# Altium PCB Antenna.PcbDoc
Units mil, origin at the board's own origin, x right, y up, seen from the top; angles counter-clockwise.
Board outline 3937.01 x 3937.01 mil, 2 copper layers (Top Layer, Bottom Layer), stack 64.567 mil thick; 11 components, 11 nets, 52 pads, 8 vias.
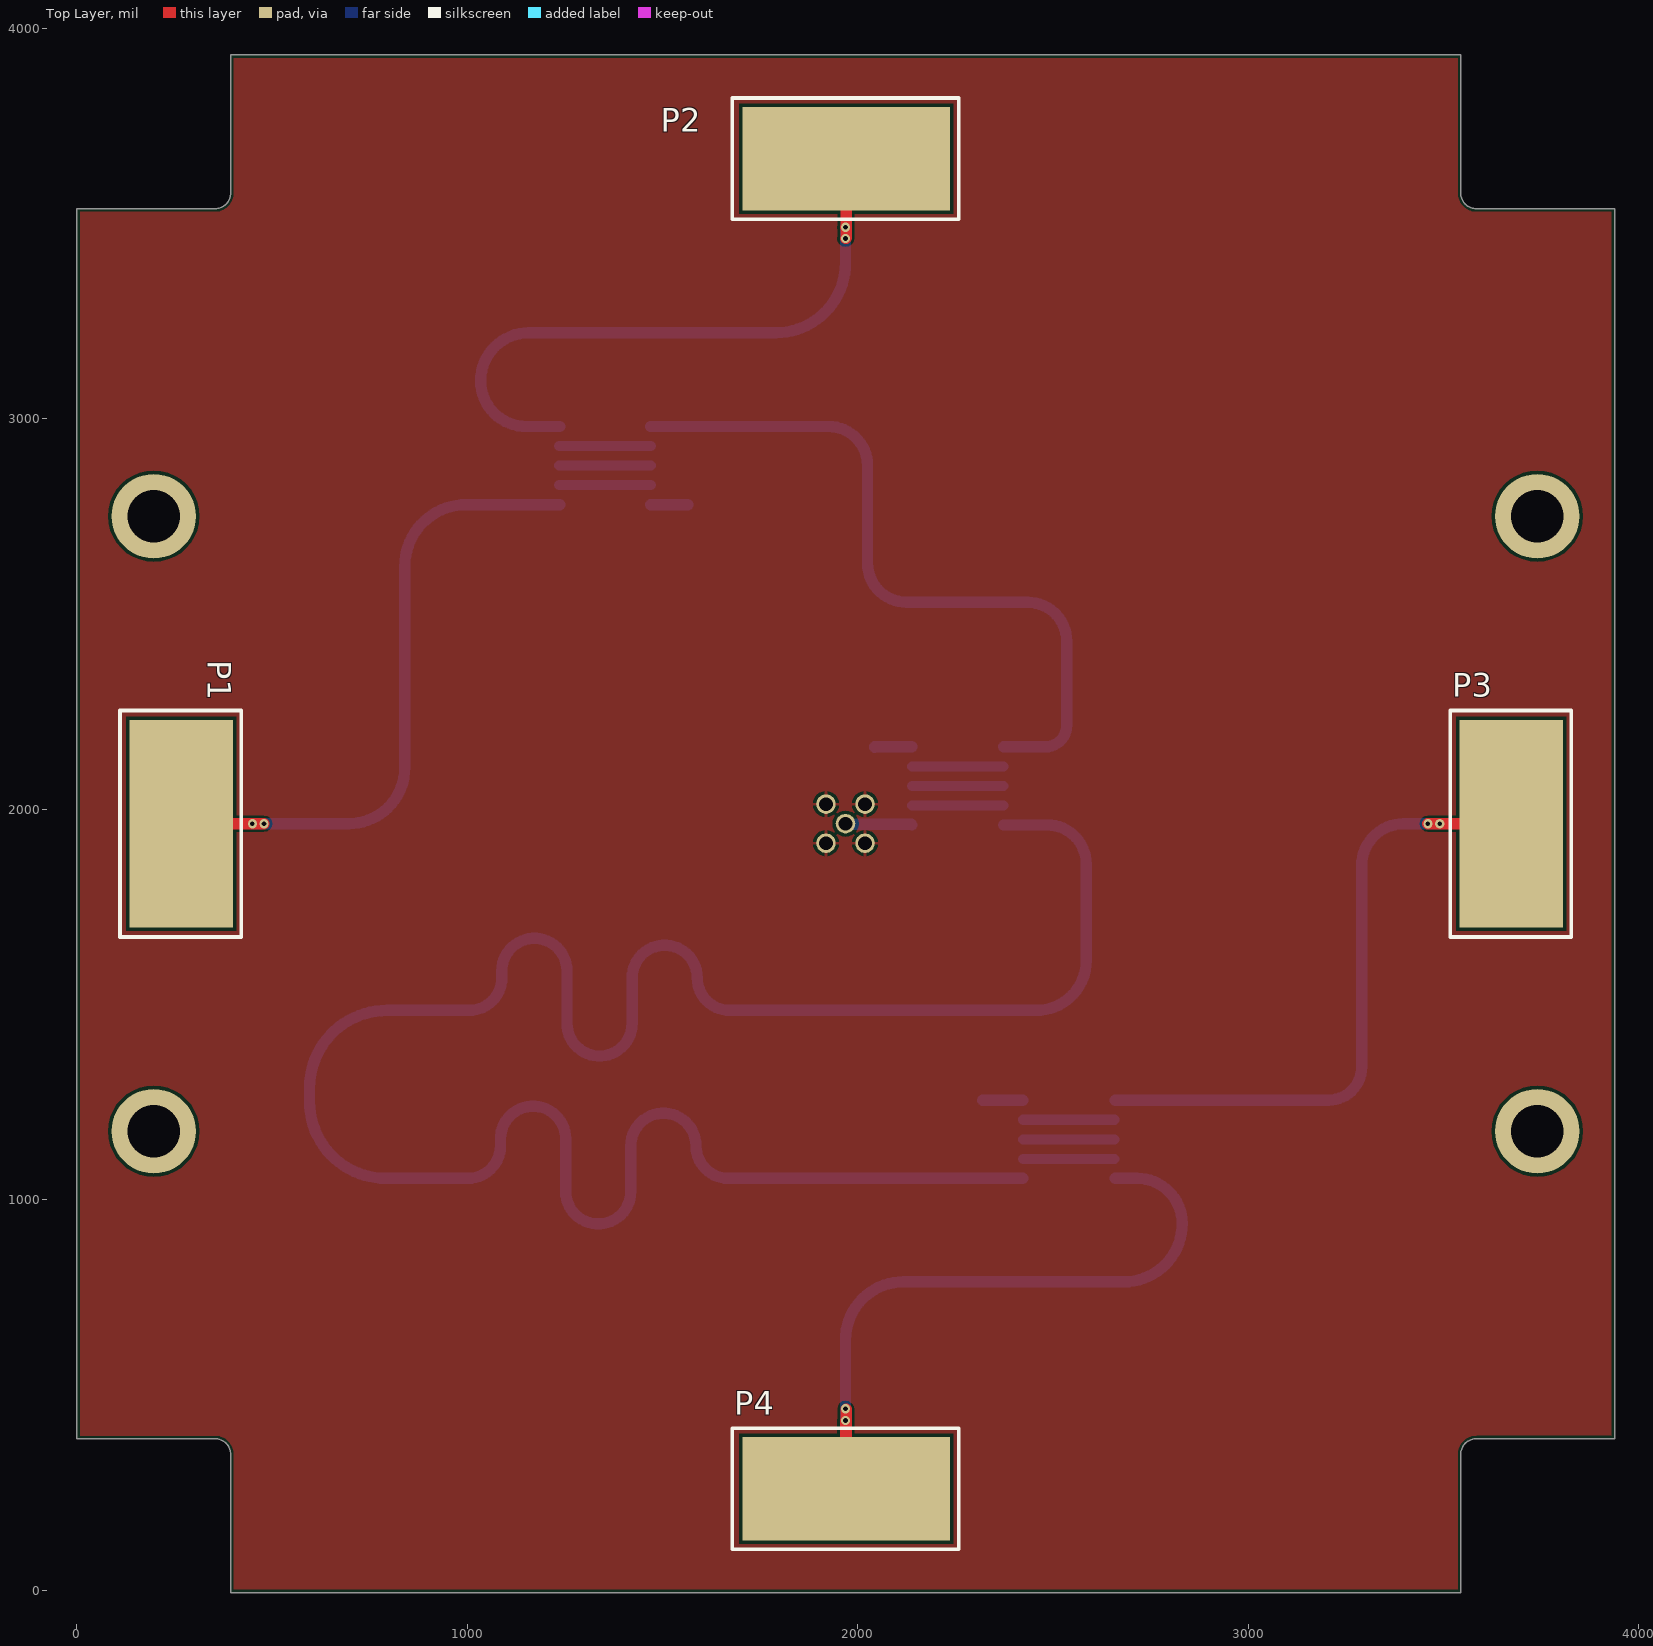
[diagram p0: Top Layer view]
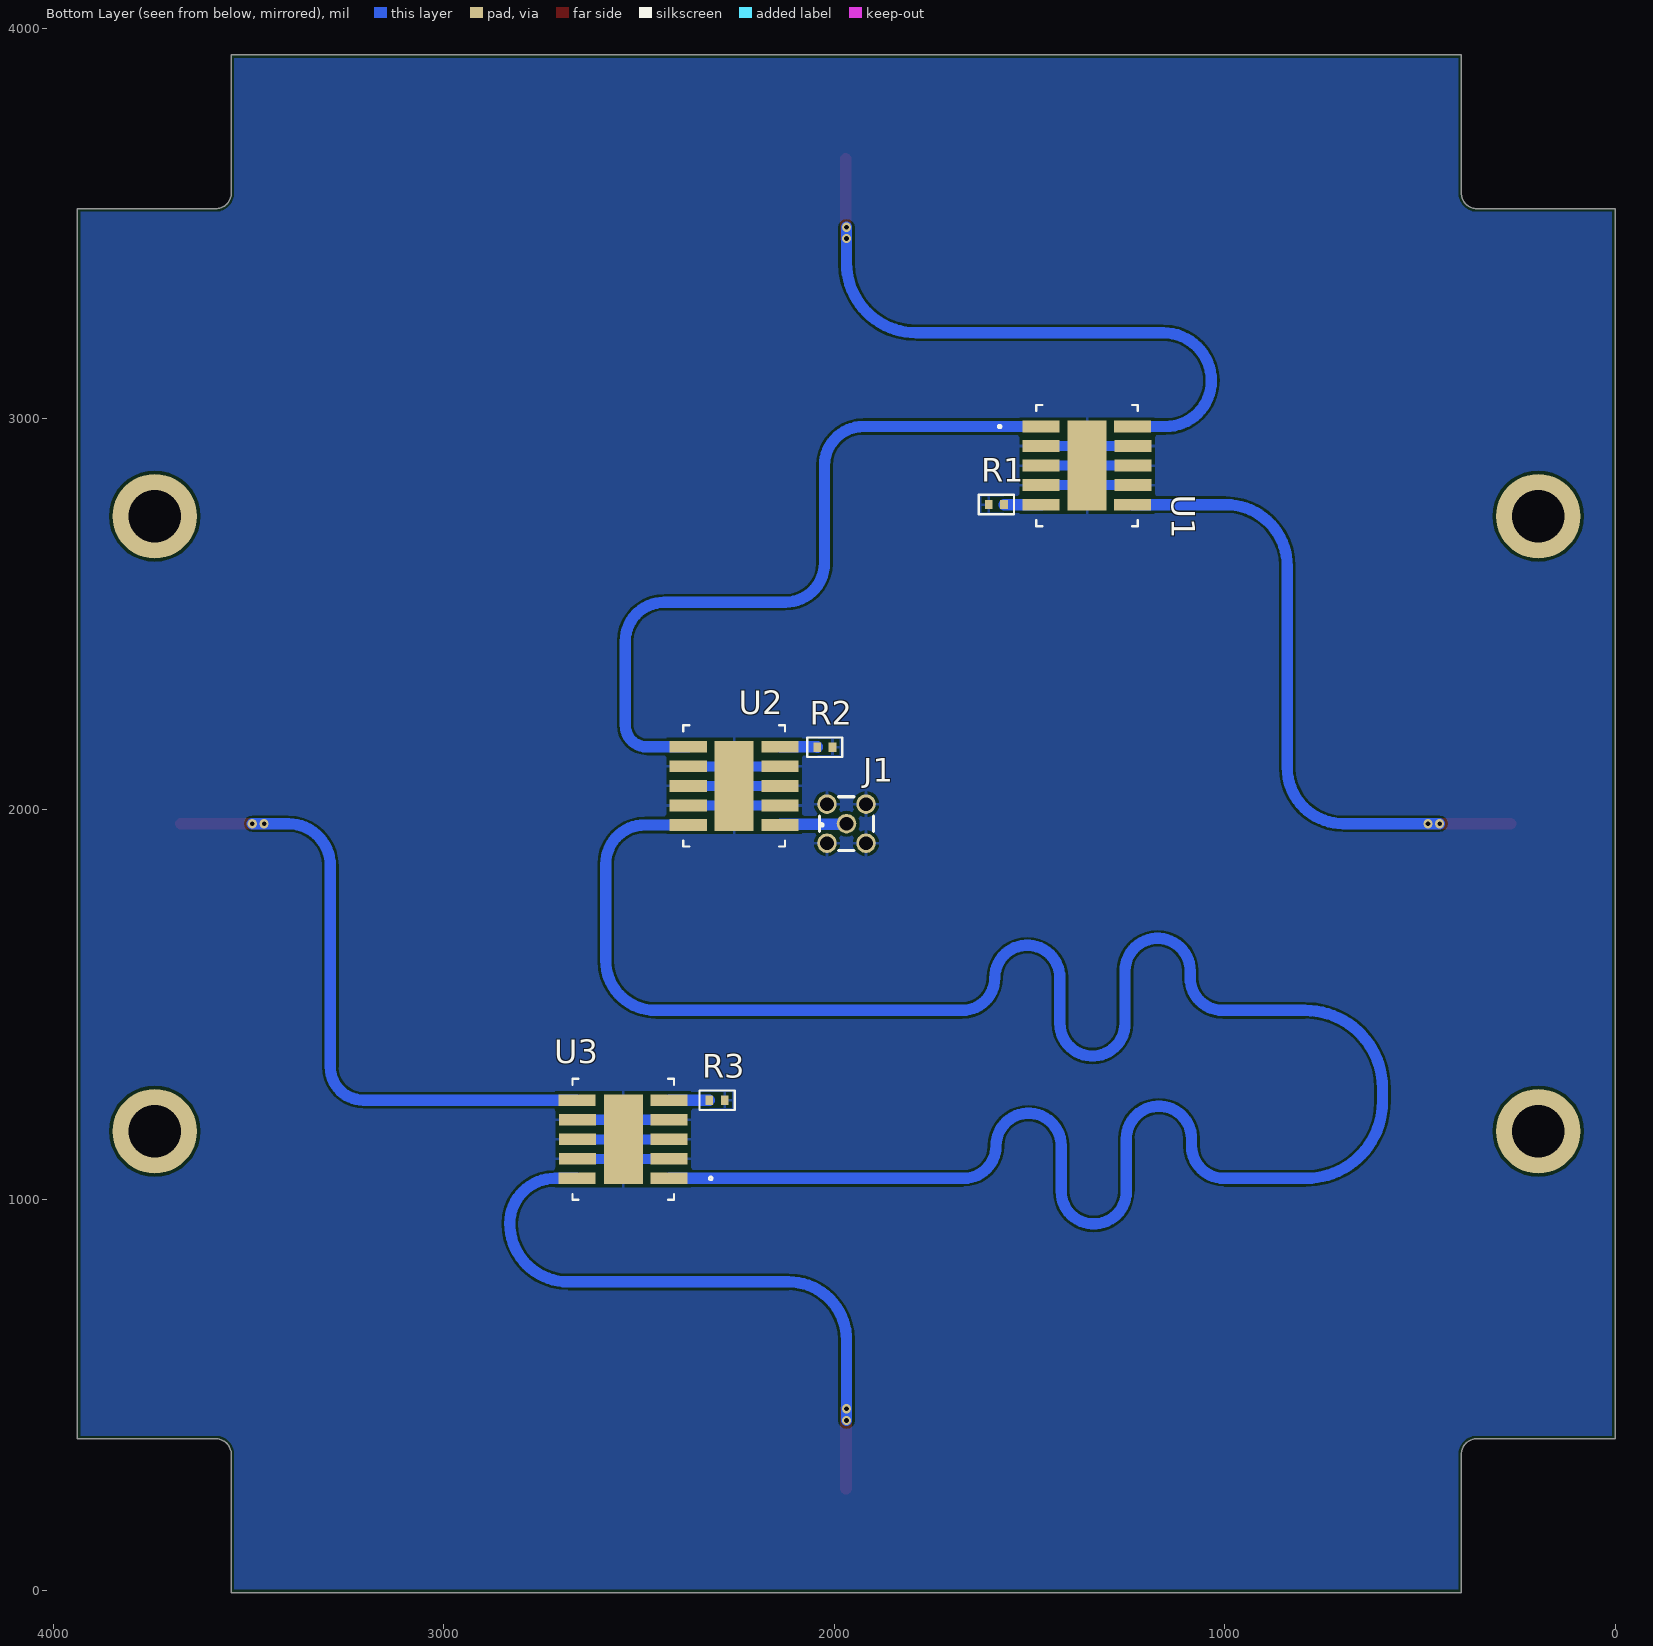
[diagram p1: Bottom Layer view, seen from below]
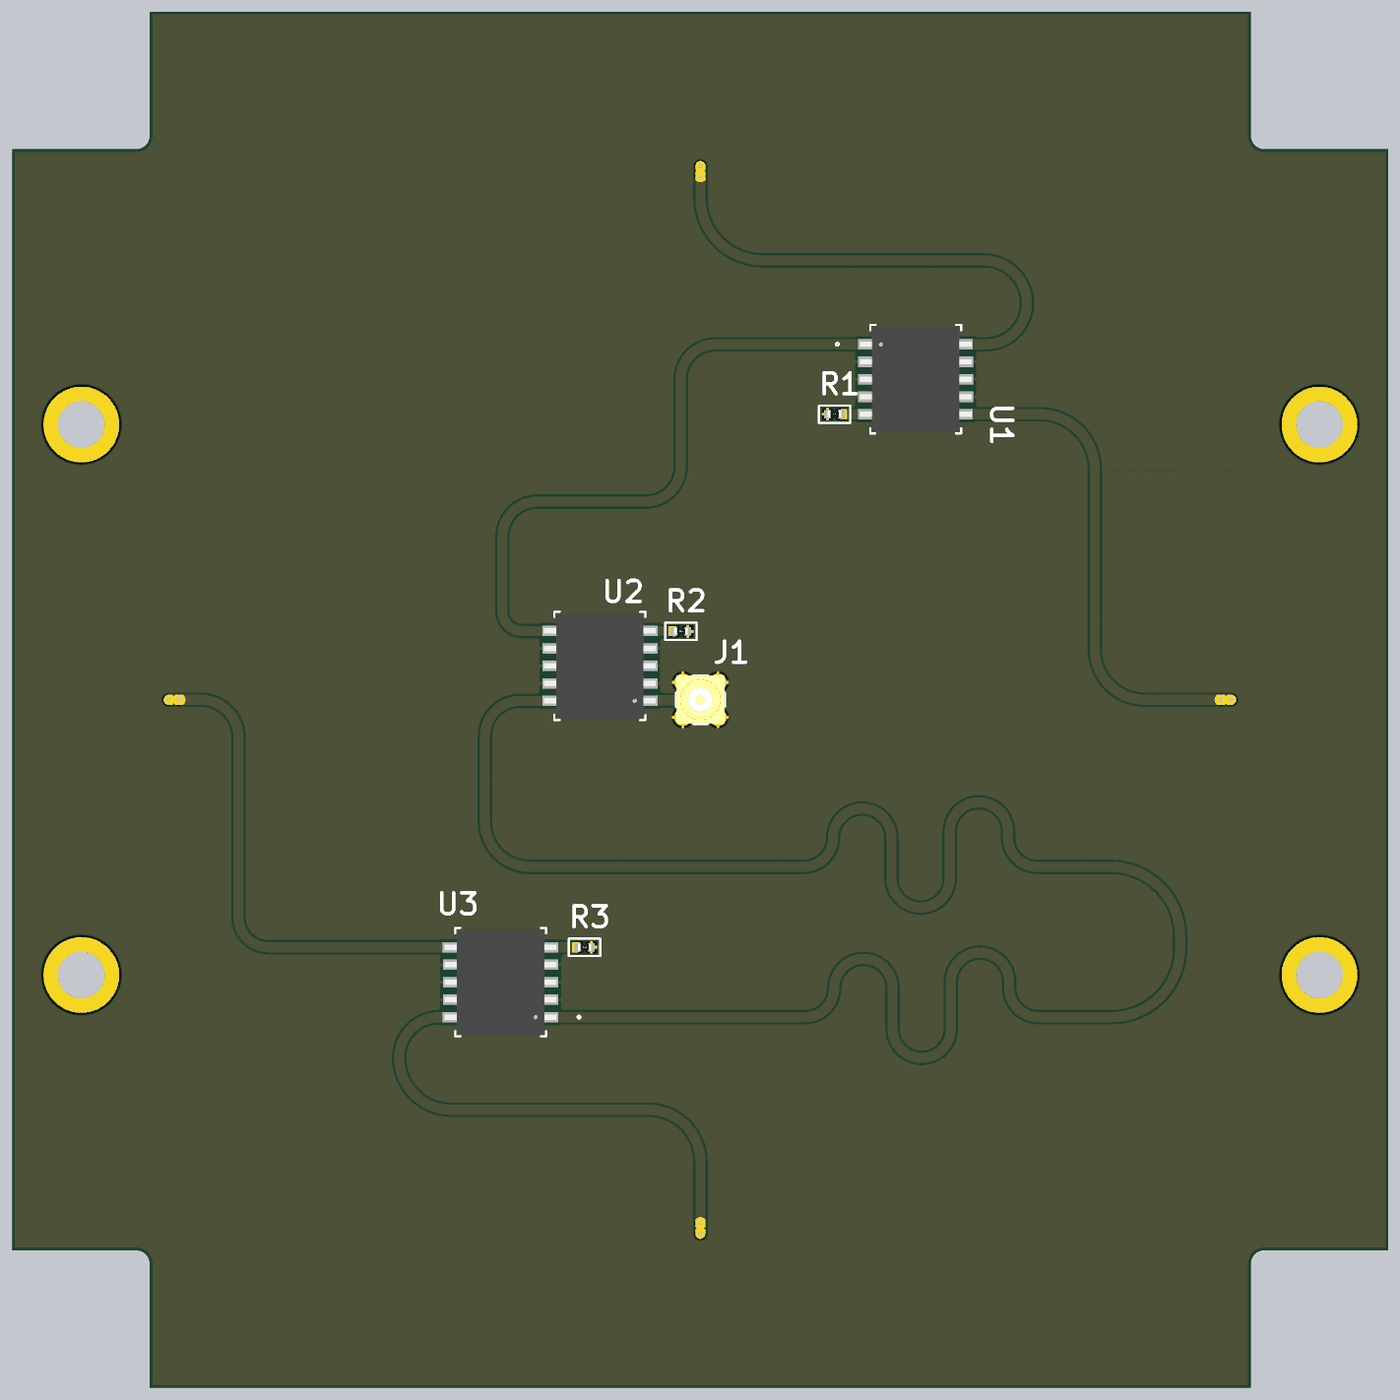
[diagram p2: 3D render of the assembled board from below, using the file's embedded part models]

## Layer stack, top to bottom
Top Solder: solder mask 0.4, Solder Resist, Dk 3.5
Top Layer: signal copper 1.378
Dielectric 1: core 61.811, FR-4, Dk 4.5
Bottom Layer: signal copper 1.378
Bottom Solder: solder mask 0.4, Solder Resist, Dk 3.5

## Board outline
0.5,388.2 354.83,388.2 cw(c354.83,348.83) 394.2,348.83 394.2,-5.5 3543.81,-5.5 3543.81,348.83 cw(c3583.18,348.83) 3583.18,388.2 3937.51,388.2 3937.51,3537.81 3583.18,3537.81 cw(c3583.18,3577.18) 3543.81,3577.18 3543.81,3931.51 394.2,3931.51 394.2,3577.18 cw(c354.83,3577.18) 354.83,3537.81 0.5,3537.81

## Design rules (kind name [scope] priority, off if disabled: settings)
BoardOutlineClearance [All] p1: gap=7.87 ignorepadtopadclearanceinfootprint=FALSE
Clearance [All] p1: gap=8 ignorepadtopadclearanceinfootprint=FALSE except(6.02: Arc-Poly Track-Poly; 9.84: Arc-Hole Track-Hole SMDPad-Hole THPad-Hole Via-Hole Fill-Hole Poly-Hole Region-Hole)
ComponentClearance [All] p1: gap=5 collisioncheckmode=3 verticalgap=5 showdistances=TRUE
DiffPairsRouting [All] p1: maxlimit=15 minlimit=8 mostfreqgap=8 toplayer_minwidth=8 toplayer_maxwidth=1000 toplayer_prefwidth=8 bottomlayer_minwidth=8 bottomlayer_maxwidth=1000 bottomlayer_prefwidth=8 maxuncoupledlength=8
Height [All] p1: minheight=0 maxheight=71497.94 prefheight=71497.94
HoleSize [All] p1: absolutevalues=TRUE maxlimit=248.03 minlimit=11.81 maxpercent=80.000 minpercent=20.000
HoleToHoleClearance [All] p1: gap=9.84 allowstackedmicrovias=TRUE
LayerPairs [All] p1: enforce=FALSE
Length [InNet('90deg')] p1: maxlimit=5984.25 minlimit=5944.88
MatchedLengths [InNetClass('L2')] p1: tolerance=19.68 checknetsindiffpair=FALSE checkdiffpairvsdiffpair=TRUE checkxsignals=TRUE checkothers=TRUE
MaxMinImpedance [InNetClass('RF')] p1: minimum=49.00 maximum=51.00
MinimumAnnularRing [All] p1: minimumring=5.12
MinimumSolderMaskSliver [All] p1: minsoldermaskwidth=0
PlaneConnect PlaneConnectPowerPads [InPadClass('PowerPads')] p1: planeconnectstyle=Direct reliefexpansion=20 reliefentries=4 reliefconductorwidth=10 reliefairgap=10
PlaneConnect [All] p2: pad.planeconnectstyle=Relief pad.reliefexpansion=11.81 pad.reliefentries=4 pad.reliefconductorwidth=8 pad.reliefairgap=8 via.planeconnectstyle=Direct via.reliefexpansion=11.81 via.reliefentries=4 via.reliefconductorwidth=5 via.reliefairgap=10
PolygonConnect PolygonConnectPowerPads [All vs (InPadClass('PowerPads'))] p1: connectstyle=Direct reliefconductorwidth=10 reliefentries=4 polygonreliefangle="90 Angle" airgapwidth=10
PolygonConnect [All] p2: thpad.connectstyle=Relief thpad.reliefconductorwidth=8 thpad.reliefentries=4 thpad.polygonreliefangle="90 Angle" thpad.airgapwidth=8 smdpad.connectstyle=Relief smdpad.reliefconductorwidth=8 smdpad.reliefentries=4 smdpad.polygonreliefangle="90 Angle" smdpad.airgapwidth=8 via.connectstyle=Direct via.reliefconductorwidth=5 via.reliefentries=4 via.polygonreliefangle="90 Angle" via.airgapwidth=10
RoutingVias [All] p1: holewidth=11.81 width=23.62 viastyle="Through Hole" minholewidth=11.81 minwidth=23.62 maxholewidth=23.62 maxwidth=50
SilkToSilkClearance [All] p1: silktosilkclearance=0
SilkToSolderMaskClearance [IsPad] p1: minsilkscreentomaskgap=5 clearancetoexposedcopper=TRUE
SolderMaskExpansion [All] p1: expansion=6 istentingtop=FALSE
Width [All] p1: maxlimit=38.58 minlimit=7.99 preferedwidth=29.09 impedanceprofiledriven=TRUE impedanceprofileid={7237DB53-FBA2-406F-8DA8-652FD939FA0D} impedanceprofilevalue=50.000000 minimp=50.000000 maximp=50.000000 favimp=50.000000
20 further rules are at their usual default settings.

## Components (designator, comment, footprint, x,y, rotation, side; value= is the part's Value field where it differs from the comment)
J1 "MMCX_0734151471" MMCX_0734151471 1968.5,1963.01 r180 bottom
P1 "Antenna_Pad" ANTENNA_PAD#1 266.26,1962.99 r90 top
P2 "Antenna_Pad" ANTENNA_PAD#2 1968.5,3665.75 r0 top
P3 "Antenna_Pad" ANTENNA_PAD#1 3671.77,1962.99 r90 top
P4 "Antenna_Pad" ANTENNA_PAD#2 1968.5,260.24 r0 top
R1 "50" R0402 1584.68,2780 r180 bottom
R2 "50" R0402 2024.06,2158.88 r0 bottom
R3 "50" R0402 2300,1255 r0 bottom
U1 "QBA-07+" SM1L_MNC#1 1352.5,2880 r180 bottom
U2 "QBA-07+" SM1L_MNC#2 2256.09,2059.76 r0 bottom
U3 "QBA-07+" SM1L_MNC#3 2540,1155 r0 bottom

## Footprints (in the part's own frame and the unit in brackets; to place one, negate y for a bottom-side part, rotate by r counter-clockwise, add the part's x,y. Pads: shape width x height; smd on the part's side, far side on the other; paste and mask are expansions set on the pad)
ANTENNA_PAD#1 [mm] "Pad for Tape Measure antenna"
  rect 13.5x6.75 smd: 1(0,-0.038)
  silkscreen extent -7.37,-3.94 7.37,3.94
ANTENNA_PAD#2 [mm] "Pad for Tape Measure antenna"
  rect 13.5x6.75 smd: 1(0.038,0)
  silkscreen extent -7.37,-3.94 7.37,3.94
MMCX_0734151471 [mil]
  round 50 hole 35: 1(0,0) 2(-50,50) 3(-50,-50) 4(50,-50) 5(50,50)
  silkscreen extent -69,-69 69,69, body extent -69,-69 69,69, height 174
R0402 [mm]
  rect 0.5x0.6 smd: 1(-0.5,0) 2(0.5,0)
  silkscreen extent -1.14,-0.64 1.14,0.64, body extent -0.5,-0.25 0.5,0.25, height 0.34
SM1L_MNC#1 [mil]
  rect 95x30 smd paste+0 mask+0: 1(-117.5,100) 2(-117.5,50) 3(-117.5,0) 4(-117.5,-50) 5(-117.5,-100) 6(116,-100) 7(117.5,-50) 8(117.5,0) 9(117.5,50) 10(116,100)
  rect 100x230 smd paste+0 mask+0: 11(0,0)
  silkscreen extent -228,-155 130,155, body extent -160,-150 160,150, height 70
SM1L_MNC#2 [mil]
  rect 95x30 smd paste+0 mask+0: 1(-117.5,100) 2(-117.5,50) 3(-117.5,0) 4(-117.5,-50) 5(-117.5,-100) 6(117.5,-100) 7(117.5,-50) 8(117.5,0) 9(117.5,50) 10(117.5,100)
  rect 100x230 smd paste+0 mask+0: 11(0,0)
  silkscreen extent -228,-155 130,155, body extent -160,-150 160,150, height 70
SM1L_MNC#3 [mil]
  rect 95x30 smd paste+0 mask+0: 1(-117.5,100) 2(-117.5,50) 3(-117.5,0) 4(-117.5,-50) 5(-117.5,-100) 6(119,-100) 7(117.5,-50) 8(117.5,0) 9(117.5,50) 10(119,100)
  rect 100x230 smd paste+0 mask+0: 11(0,0)
  silkscreen extent -228,-155 130,155, body extent -160,-150 160,150, height 70

## Part data
J1: library part MMCX_Straight, "Conn MMCX RCP 50Ohm Solder ST Thru-Hole Gold Bulk", Manufacturer Part Number=73415-1471, Supplier Part Number 1=0734151471, ComponentLink1Description=https://datasheet.ciiva.com/7002/734151471-sd-7002529.pdf?src-supplier=Digi-Key, ComponentLink1URL=https://datasheet.ciiva.com/7002/734151471-sd-7002529.pdf?src-supplier=Digi-Key, Supplier 1=Avnet
R1 R2 R3: library part RES_50_0603_1.5W, "50 Ohm Space Resistor", Case Code (Imperial)=0402, Case Code (Metric)=1005, Manufacturer=Yageo, Manufacturer Part Number=311-430JRCT-ND, Max Operating Temperature=155°C, Max Power Dissipation=63mW, Min Operating Temperature=-55°C, Package Quantity=1, Power Rating=62.5mW, Resistance=430R, Supplier Part Number 1=541-2655-1-ND, Temperature Coefficient=100ppm/°C, Tolerance=5%, Voltage Rating=50V, Case/Package=0402, Category="Chip SMD Resistors", ComponentLink1Description=https://datasheet.ciiva.com/2452/pyu-r-int-thick-7-2452725.pdf?src-supplier=Digi-Key, ComponentLink1URL=https://datasheet.ciiva.com/2452/pyu-r-int-thick-7-2452725.pdf?src-supplier=Digi-Key, ComponentLink2Description=https://datasheet.ciiva.com/16743/pyu-rc0402-51-rohs-l-6-r-16743893.pdf?src-supplier=Future+Electronics, ComponentLink2URL=https://datasheet.ciiva.com/16743/pyu-rc0402-51-rohs-l-6-r-16743893.pdf?src-supplier=Future+Electronics, ComponentLink3Description=https://datasheet.ciiva.com/16863/pyu-rc0402-51-rohs-l-6-16863285.pdf?src-supplier=Avnet+Europe, ComponentLink3URL=https://datasheet.ciiva.com/16863/pyu-rc0402-51-rohs-l-6-16863285.pdf?src-supplier=Avnet+Europe, ComponentLink4Description=https://datasheet.ciiva.com/2452/pyu-r-int-thick-7-2452726.pdf?src-supplier=Digi-Key, ComponentLink4URL=https://datasheet.ciiva.com/2452/pyu-r-int-thick-7-2452726.pdf?src-supplier=Digi-Key, ComponentLink5Description=https://datasheet.ciiva.com/2452/pyu-r-int-thick-7-2452727.pdf?src-supplier=Digi-Key, ComponentLink5URL=https://datasheet.ciiva.com/2452/pyu-r-int-thick-7-2452727.pdf?src-supplier=Digi-Key, ComponentLink6Description=https://datasheet.ciiva.com/28390/pyu-rc0402-51-rohs-l-6-28390744.pdf?src-supplier=Avnet+Europe, ComponentLink6URL=https://datasheet.ciiva.com/28390/pyu-rc0402-51-rohs-l-6-28390744.pdf?src-supplier=Avnet+Europe, Composition="Thick Film", Contact Plating=Tin,Matte, Depth=0.5mm, Features="Moisture Resistant", Height=0.016inch, Lead Free="Lead Free", Length=0.039inch, Military Standard=Not, Number of Terminations=2, Packaging="Tape and Reel", Pricing 1="1=0.10000, 10=0.01300, 100=0.00530, 1000=0.00236, 2500=0.00205, 5000=0.00169 (USD)", RoHS=Yes, Stock 1=521, Supplier 1=Digi-Key, Termination=SMD/SMT, Voltage Rating (DC)=50V, Width=0.02inch, Working Voltage=50V
U1 U2 U3: "No Description Available", Mfr_Name="Mini Circuits", Copyright="Copyright (C) 2022 Ultra Librarian. All rights reserved.", Manufacturer Part Number=QBA-07+, RefDes=RefDes, Type=DEV

## Free pads (board coordinates)
  round 216.54 hole 133.86 unplated: 3(197.37,1175.61) 3(197.37,2750.41) 3(3739.64,1175.61) 3(3739.64,2750.41)

## Via types
v1: diameter 23.62, hole 11.81, Top Layer to Bottom Layer, 8 vias

## Nets (pads, with @x,y where several pads share a name; then routed paths per layer and width w, separated by ;. In a path a pad name is that pad's centre, name@x,y a point inside that pad or via, vN(x,y) a via of type N, cw(c..) or ccw(c..) an arc to the next point about the centre after c; other vN are vias at no path point)
0deg: U1.1 U2.6 | length 1894.2
  Bottom Layer w29: U1.1 1925,2980 cw(c1925,2880) 2025,2880 2025,2630 ccw(c2125,2630) 2125,2530 2435,2530 cw(c2435,2430) 2535,2430 2535,2215 cw(c2479.76,2215) 2479.76,2159.76 U2.6
90deg: U2.10 U3.1 | length 5964.6
  Bottom Layer w29: U2.10 2485,1959.76 cw(c2485,1859.76) 2585,1859.76 2585,1612.93 cw(c2457.07,1612.93) 2457.07,1485 1841.54,1485 1672.36,1485 cw(c1672.36,1568.41) 1588.95,1568.41 ccw(c1505.53,1568.41) 1422.12,1568.41 1422.12,1451.65 cw(c1338.71,1451.65) 1255.29,1451.65 1255.29,1586.31 ccw(c1171.88,1586.31) 1088.46,1586.31 1088.46,1568.41 cw(c1005.05,1568.41) 1005.05,1485 990.55,1485 794.45,1485 ccw(c794.45,1286.77) 596.22,1286.77 596.22,1250.85 ccw(c792.07,1250.85) 722.73,1067.69 ccw(c792.07,1250.85) 792.07,1055 987.2,1055 1001.7,1055 ccw(c1001.7,1138.41) 1085.12,1138.41 1085.12,1156.31 cw(c1168.53,1156.31) 1251.95,1156.31 1251.95,1021.72 ccw(c1335.36,1021.72) 1418.77,1021.72 1418.77,1138.41 cw(c1502.19,1138.41) 1585.6,1138.41 ccw(c1669.01,1138.41) 1669.01,1055 1785.43,1055 1808.57,1055 U3.1
Ant1: P1.1 U1.6 | length 1686.1
  Top Layer w29: P1.1 v1(450,1962.99) v1(479.57,1962.99)
  Bottom Layer w29: v1(450,1962.99) v1(479.57,1962.99) 696.58,1962.99 ccw(c696.58,2106.41) 840,2106.41 840,2622.31 cw(c997.69,2622.31) 997.69,2780 U1.6
Ant2: P2.1 U1.10 | length 1674.2
  Top Layer w29: v1(1968.5,3461.29) ccw(c1968.5,3462.78) 1970,3462.78 v1@1970,3491.5 ; v1(1968.5,3490) ccw(c1968.5,3491.5) v1@1970,3491.5 ; P2.1 v1@1970,3491.5
  Bottom Layer w29: U1.10 1151.57,2980 cw(c1151.31,3096.97) 1034.34,3096.97 cw(c1157.38,3096.96) 1157.38,3220 1789.69,3220 ccw(c1789.69,3398.82) 1968.5,3398.82 v1(1968.5,3461.29) v1(1968.5,3490)
Ant3: P3.1 U3.6 | length 1669.8
  Top Layer w29: v1(3459.59,1962.99) v1(3490,1962.99) P3.1
  Bottom Layer w29: U3.6 3205,1255 ccw(c3205,1340) 3290,1340 3290,1855 cw(c3397.99,1855) 3397.99,1962.99 v1(3459.59,1962.99) v1(3490,1962.99)
Ant4: P4.1 U3.10 | length 1855.2
  Top Layer w29: v1(1968.5,435) 1968.5,261.73 ccw(c1970,261.73) P4.1 v1@1970,463.61
  Bottom Layer w29: v1(1968.5,435) v1(1968.5,465.11) 1968.5,641.57 cw(c2116.93,641.57) 2116.93,790 2681.12,790 ccw(c2681.12,939.44) 2830.56,939.44 ccw(c2715,939.44) 2715,1055 U3.10
GND: J1.2 J1.3 J1.4 J1.5 R1.1 R2.1 R3.1 U1.2 U1.3 U1.4 U1.7 U1.8 U1.9 U1.11 U2.2 U2.3 U2.4 U2.7 U2.8 U2.9 U2.11 U3.2 U3.3 U3.4 U3.7 U3.8 U3.9 U3.11 | length 2115
  Bottom Layer w25.68: U1.7 U1.4 ; U1.8 U1.11 U1.3 ; U1.9 U1.2 ; U2.2 U2.9 ; U2.3 U2.11 U2.8 ; U2.4 U2.7 ; U3.2 U3.9 ; U3.3 U3.11 U3.8 ; U3.4 U3.7
NetR1_2: R1.2 U1.5 | length 95
  Bottom Layer w29: U1.5 R1.2
NetR2_2: R2.2 U2.5 | length 95.7
  Bottom Layer w29: R2.2 2043.75,2159.74 U2.5
NetR3_2: R3.2 U3.5 | length 102.8
  Bottom Layer w29: R3.2 U3.5
Radio: J1.1 U2.1 | length 171.4
  Bottom Layer w29: J1.1 1970.13,1961.38 2136.96,1961.38 U2.1

## Polygon pours and split planes (outlines as drawn)
GND on Top Layer "Top" (solid, remove dead copper, pour order 0): 0.5,388.2 354.83,388.2 cw(c354.83,348.83) 394.2,348.83 394.2,-5.5 3543.81,-5.5 3543.81,348.83 cw(c3583.18,348.83) 3583.18,388.2 3937.51,388.2 3937.51,3537.81 3583.18,3537.81 cw(c3583.18,3577.18) 3543.81,3577.18 3543.81,3931.51 394.2,3931.51 394.2,3577.18 cw(c354.83,3577.18) 354.83,3537.81 0.5,3537.81
GND on Bottom Layer "Bottom" (solid, remove dead copper, pour order 1): 0.5,388.2 354.83,388.2 cw(c354.83,348.83) 394.2,348.83 394.2,-5.5 3543.81,-5.5 3543.81,348.83 cw(c3583.18,348.83) 3583.18,388.2 3937.51,388.2 3937.51,3537.81 3583.18,3537.81 cw(c3583.18,3577.18) 3543.81,3577.18 3543.81,3931.51 394.2,3931.51 394.2,3577.18 cw(c354.83,3577.18) 354.83,3537.81 0.5,3537.81

## Silkscreen, mask and mechanical layers (free items; w line width, h text height)
Mechanical 1:
  the board outline again, w0.5